# Altium PCB PCB.PcbDoc (part 5 of 11)
Units mm, origin at the board's own origin, x right, y up, seen from the top; angles counter-clockwise.
Board outline 100.46 x 70.51 mm, 10 copper layers (L1(SIG), L2(GND), L3(PWR), L4(SIG), L5(GND), L6(SIG), L7(GND), L8(SIG), L9(GND), L10(SIG)), stack 1.49 mm thick; 425 components, 324 nets, 2004 pads, 1425 vias.
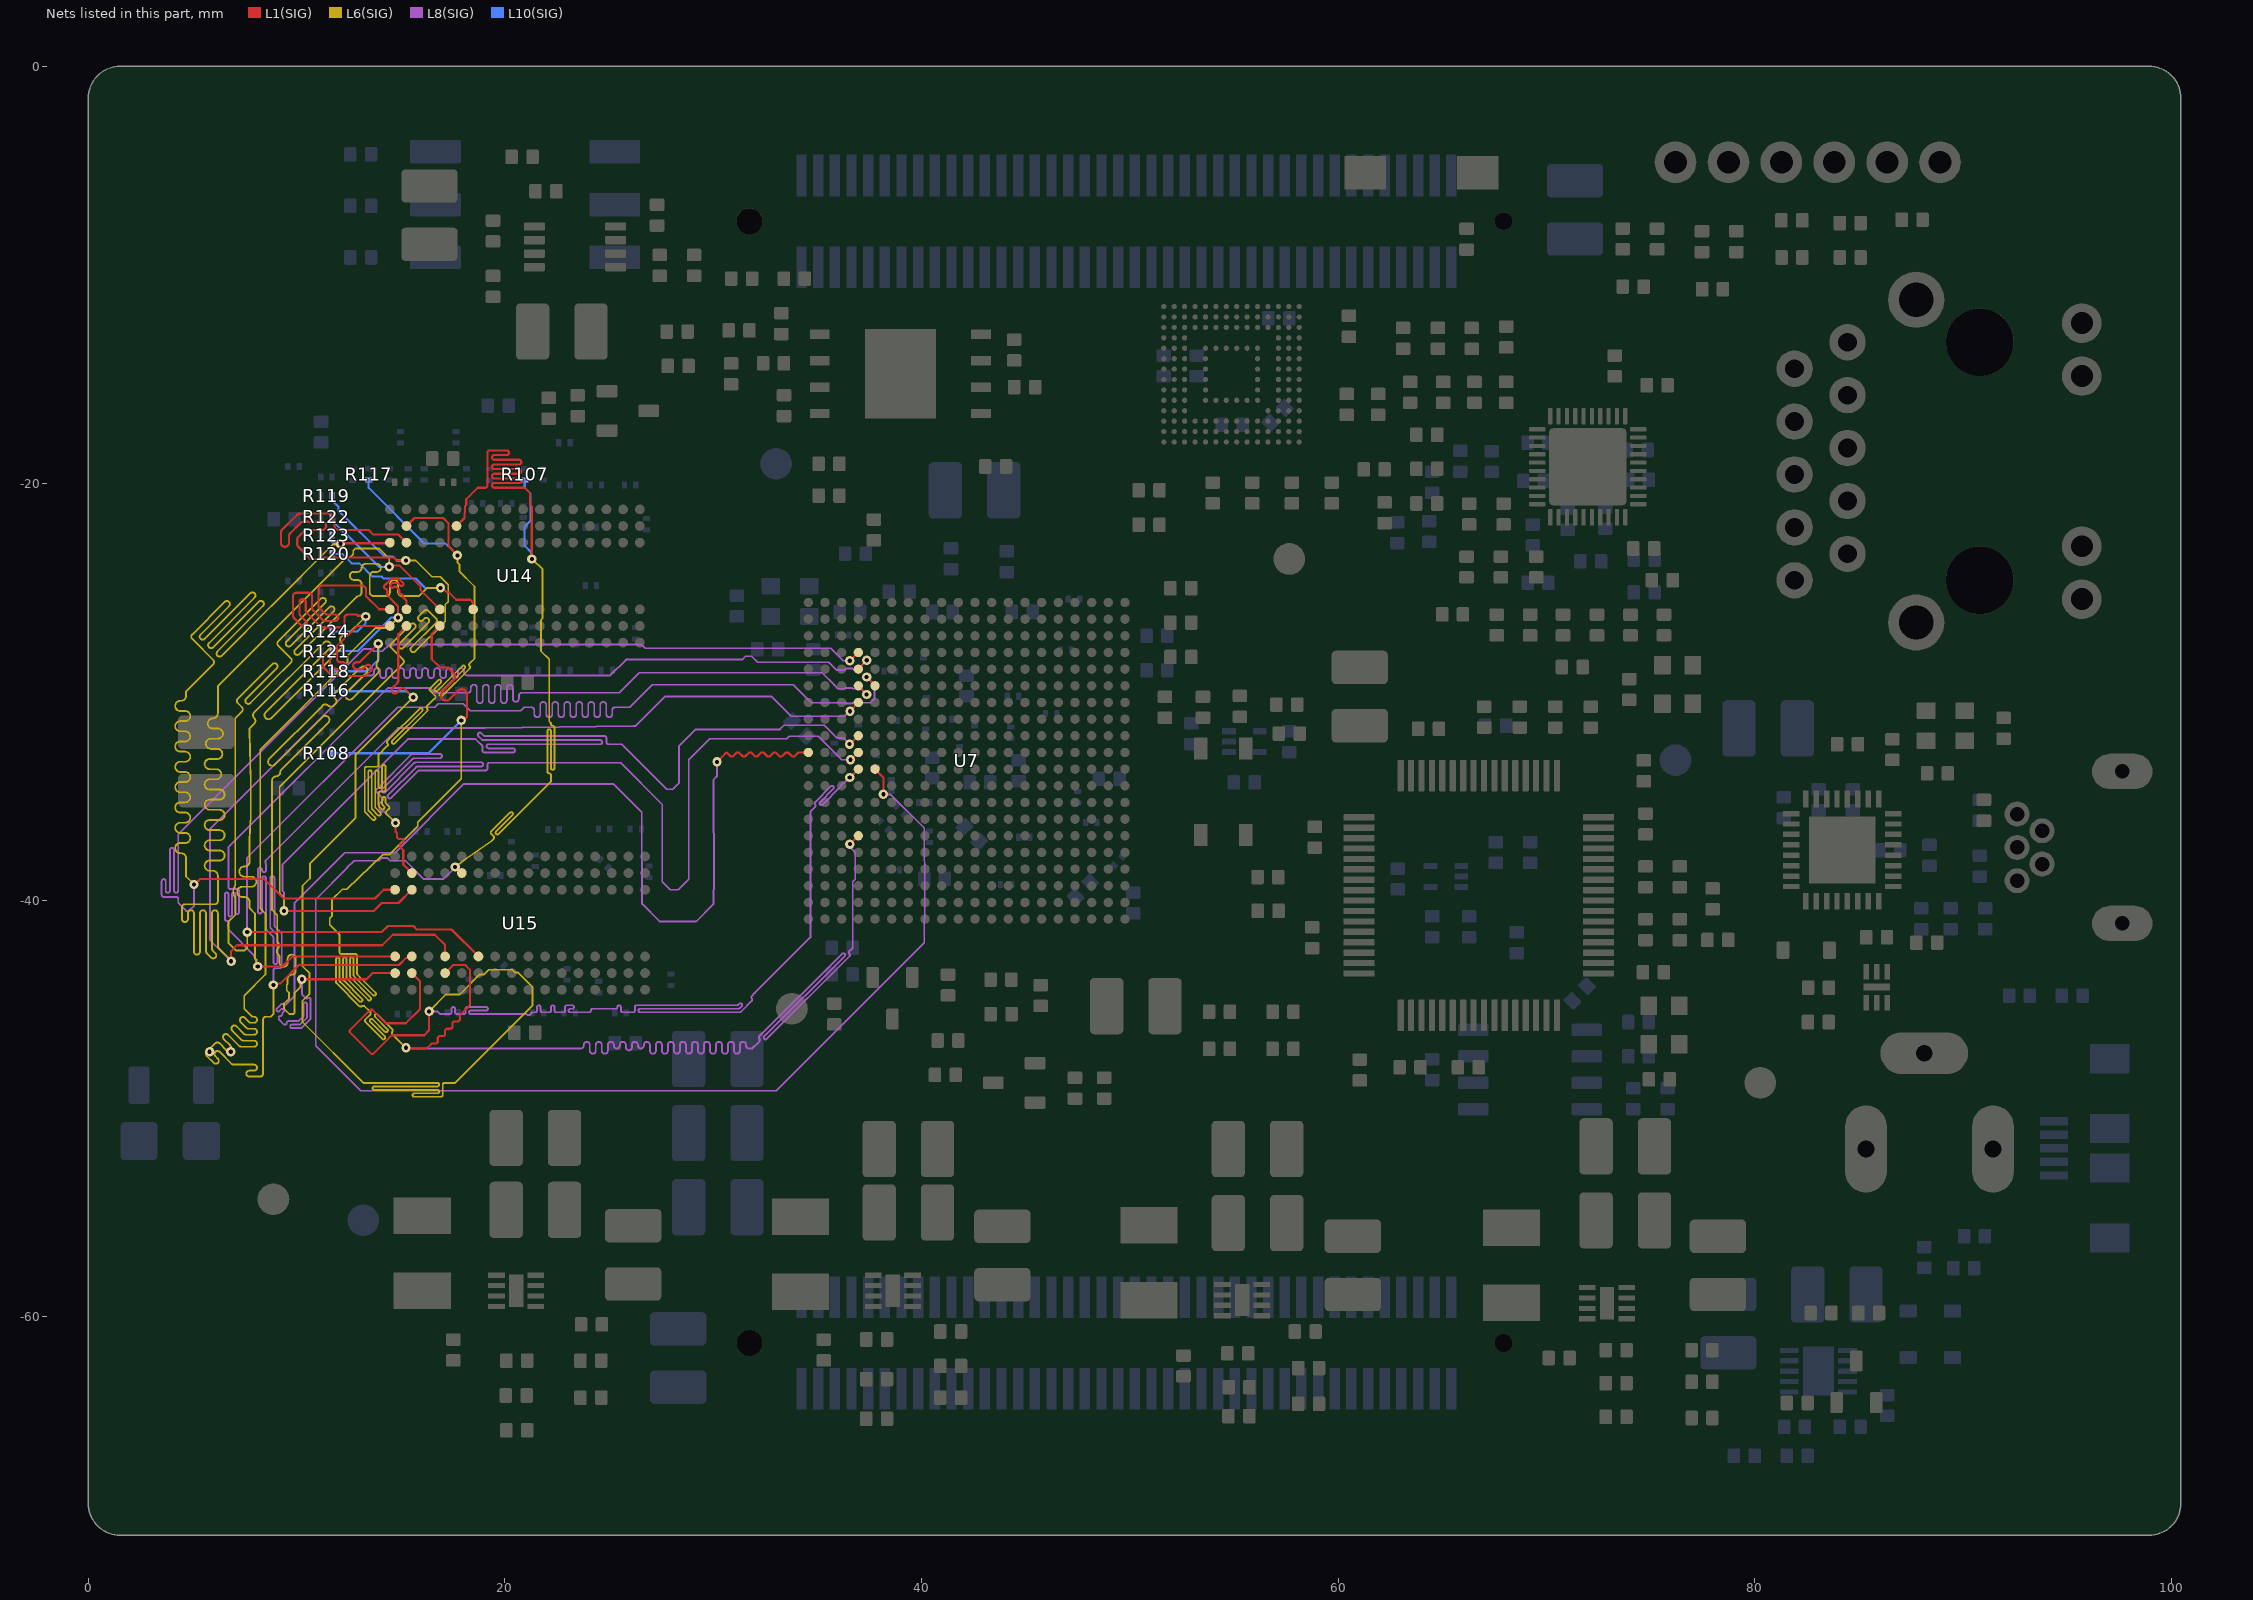
[diagram p12: the nets of this part, all layers, seen from the top]

## Via types
v1: diameter 0.45, hole 0.2, L1(SIG) to L10(SIG), tented both sides, 1194 vias
v2: diameter 0.45, hole 0.2, L1(SIG) to L10(SIG), 211 vias
v3: diameter 0.6, hole 0.25, L1(SIG) to L10(SIG), 9 vias
v4: diameter 0, hole 0.2, L1(SIG) to L10(SIG), tented both sides, 6 vias
v5: diameter 5, hole 3.2, L1(SIG) to L10(SIG), tented both sides, 4 vias
v6: diameter 0.45/0.45/0.45/0.45/0.45/0.45/0.45/0.45/0.45/0.45 (per signal layer), hole 0.2, L1(SIG) to L10(SIG), tented both sides, 1 vias

## Nets (pads, with @x,y where several pads share a name; then routed paths per layer and width w, separated by ;. In a path a pad name is that pad's centre, name@x,y a point inside that pad or via, vN(x,y) a via of type N, cw(c..) or ccw(c..) an arc to the next point about the centre after c; other vN are vias at no path point) (continued)
DDR_A6: R116.1 U7.L4 U14.R8 U15.R8 | length 117
  L1(SIG) w0.103: U14.R8@15.279,-26.839 14.883,-27.235 14.883,-28.809 14.883,-29.479 cw(c14.731,-29.479) 14.838,-29.586 14.608,-29.816 ccw(c14.715,-29.924) 14.608,-30.031 ccw(c14.715,-29.924) 14.822,-30.031 14.992,-29.861 cw(c15.1,-29.968) 15.207,-29.861 15.244,-29.897 v1(15.604,-30.258) ; U15.R8@15.533,-43.501 15.923,-43.89 15.923,-45.23 15.859,-45.294 15.24,-45.913 14.286,-45.913 13.632,-45.258 13.546,-45.258 12.552,-46.252 12.552,-46.338 13.594,-47.379 13.679,-47.379 14.573,-46.486 16.129,-46.486 16.362,-46.253 v1(16.362,-45.338) ; v1@36.57,-34.11 U7.L4@36.97,-33.71
  L6(SIG) w0.088: v1(15.604,-30.258) 12.827,-33.036 12.827,-36.072 10.642,-38.256 10.642,-38.962 10.287,-39.317 10.287,-43.177 10.626,-43.516 10.626,-44.492 10.287,-44.831 10.287,-45.851 13.208,-48.772 13.525,-48.772 16.766,-48.772 cw(c16.766,-48.855) 16.85,-48.855 cw(c16.766,-48.855) 16.766,-48.939 13.737,-48.939 ccw(c13.737,-49.023) 13.653,-49.023 ccw(c13.737,-49.023) 13.737,-49.107 16.766,-49.107 cw(c16.766,-49.191) 16.85,-49.191 cw(c16.766,-49.191) 16.766,-49.274 15.652,-49.274 ccw(c15.652,-49.358) 15.568,-49.358 ccw(c15.652,-49.358) 15.652,-49.442 16.934,-49.442 ccw(c16.934,-49.358) 17.017,-49.358 17.017,-48.855 cw(c17.101,-48.855) 17.101,-48.772 17.145,-48.772 17.617,-48.772 21.326,-45.063 21.326,-44.157 20.647,-43.477 20.487,-43.477 20.354,-43.344 19.226,-43.344 19.006,-43.565 18.796,-43.565 17.831,-44.529 17.171,-44.529 v1(16.362,-45.338)
  L8(SIG) w0.088: v1(16.362,-45.338) 16.765,-45.338 16.893,-45.467 17.145,-45.467 17.357,-45.467 ccw(c17.357,-45.383) 17.442,-45.383 17.442,-45.215 cw(c17.526,-45.215) 17.526,-45.131 cw(c17.526,-45.215) 17.61,-45.215 17.61,-45.383 ccw(c17.694,-45.383) 17.694,-45.467 18.03,-45.467 ccw(c18.03,-45.383) 18.115,-45.383 18.115,-45.215 cw(c18.199,-45.215) 18.199,-45.131 19.103,-45.131 cw(c19.103,-45.215) 19.187,-45.215 cw(c19.103,-45.215) 19.103,-45.299 18.367,-45.299 ccw(c18.367,-45.383) 18.283,-45.383 ccw(c18.367,-45.383) 18.367,-45.467 20.95,-45.467 ccw(c20.95,-45.383) 20.954,-45.467 21,-45.465 cw(c21.003,-45.549) 21.062,-45.489 21.072,-45.5 ccw(c21.131,-45.44) 21.191,-45.5 21.282,-45.408 cw(c21.341,-45.468) 21.341,-45.384 21.46,-45.384 ccw(c21.46,-45.3) 21.544,-45.3 21.544,-45.131 cw(c21.628,-45.131) 21.628,-45.047 cw(c21.628,-45.131) 21.712,-45.131 21.712,-45.3 ccw(c21.796,-45.3) 21.796,-45.384 22.133,-45.384 ccw(c22.133,-45.3) 22.217,-45.3 22.217,-45.131 cw(c22.301,-45.131) 22.301,-45.047 cw(c22.301,-45.131) 22.385,-45.131 22.385,-45.3 ccw(c22.47,-45.3) 22.47,-45.384 22.806,-45.384 ccw(c22.806,-45.3) 22.89,-45.3 22.89,-45.131 cw(c22.974,-45.131) 22.974,-45.047 23.233,-45.047 cw(c23.233,-45.131) 23.317,-45.131 cw(c23.233,-45.131) 23.233,-45.216 23.143,-45.216 ccw(c23.143,-45.3) 23.058,-45.3 ccw(c23.143,-45.3) 23.143,-45.384 24.045,-45.384 ccw(c24.045,-45.3) 24.129,-45.3 cw(c24.213,-45.3) 24.213,-45.216 24.257,-45.216 25.273,-45.216 25.317,-45.216 ccw(c25.317,-45.131) 25.401,-45.131 cw(c25.485,-45.131) 25.485,-45.047 cw(c25.485,-45.131) 25.57,-45.131 25.57,-45.3 ccw(c25.654,-45.3) 25.654,-45.384 26.158,-45.384 ccw(c26.158,-45.3) 26.243,-45.3 26.243,-45.131 cw(c26.327,-45.131) 26.327,-45.047 31.137,-45.047 ccw(c31.137,-44.963) 31.197,-45.023 31.248,-44.972 cw(c31.307,-45.031) 31.367,-44.972 cw(c31.307,-45.031) 31.367,-45.091 31.266,-45.191 cw(c31.207,-45.131) 31.207,-45.216 26.495,-45.216 ccw(c26.495,-45.3) 26.411,-45.3 ccw(c26.495,-45.3) 26.495,-45.384 31.277,-45.384 ccw(c31.277,-45.3) 31.336,-45.36 31.855,-44.84 ccw(c31.795,-44.781) 31.855,-44.722 cw(c31.914,-44.662) 31.855,-44.603 32.005,-44.452 34.671,-41.787 34.671,-35.753 34.864,-35.56 34.895,-35.529 ccw(c34.836,-35.469) 34.895,-35.41 cw(c34.954,-35.35) 34.895,-35.291 35.652,-34.534 cw(c35.711,-34.594) 35.771,-34.534 cw(c35.711,-34.594) 35.771,-34.653 35.133,-35.291 ccw(c35.192,-35.35) 35.133,-35.41 ccw(c35.192,-35.35) 35.252,-35.41 36.097,-34.564 cw(c36.157,-34.624) 36.102,-34.56 36.139,-34.529 ccw(c36.084,-34.465) 36.168,-34.466 36.168,-34.456 cw(c36.252,-34.456) 36.252,-34.372 36.296,-34.372 v1(36.559,-34.11)
  L10(SIG) w0.103: R116.1@11.672,-29.968 15.284,-29.968 15.574,-30.258 v1(15.604,-30.258)
DDR_A7: R117.1 U7.K4 U14.R2 U15.R2 | length 109.4
  L1(SIG) w0.103: v1(14.752,-36.292) 14.752,-36.704 14.83,-36.782 14.83,-36.995 14.901,-37.065 15.113,-37.065 15.12,-37.072 15.12,-37.197 14.97,-37.347 14.97,-37.447 15.12,-37.597 15.12,-38.029 15.12,-38.287 U15.R2@15.533,-38.701 ; U14.R2@15.279,-22.039 15.666,-21.652 17.039,-21.652 17.292,-21.905 17.292,-22.999 17.723,-23.429 v1(17.723,-23.449) ; v1(36.594,-33.26) 36.607,-33.26 36.957,-32.91 U7.K4@36.97,-32.91
  L6(SIG) w0.088: v1(14.752,-36.292) 14.347,-35.887 14.316,-35.856 cw(c14.375,-35.797) 14.315,-35.738 14.435,-35.619 ccw(c14.375,-35.56) 14.435,-35.501 14.302,-35.368 cw(c14.361,-35.309) 14.277,-35.309 14.277,-35.132 ccw(c14.194,-35.132) 14.194,-35.048 ccw(c14.194,-35.132) 14.11,-35.132 14.11,-35.378 ccw(c14.194,-35.378) 14.134,-35.437 14.198,-35.501 cw(c14.138,-35.56) 14.197,-35.619 cw(c14.138,-35.56) 14.079,-35.619 13.966,-35.507 cw(c14.026,-35.448) 13.942,-35.448 13.942,-34.874 cw(c14.026,-34.874) 14.026,-34.79 14.194,-34.79 ccw(c14.194,-34.706) 14.277,-34.706 14.277,-33.597 ccw(c14.194,-33.597) 14.194,-33.513 ccw(c14.194,-33.597) 14.11,-33.597 14.11,-34.539 cw(c14.026,-34.539) 14.026,-34.622 cw(c14.026,-34.539) 13.942,-34.539 13.942,-33.848 ccw(c13.858,-33.848) 13.858,-33.764 ccw(c13.858,-33.848) 13.775,-33.848 13.775,-35.517 ccw(c13.858,-35.517) 13.799,-35.576 14.026,-35.803 cw(c13.966,-35.862) 14.026,-35.921 cw(c13.966,-35.862) 13.907,-35.921 13.631,-35.645 cw(c13.691,-35.587) 13.607,-35.587 13.607,-33.848 ccw(c13.523,-33.848) 13.523,-33.764 ccw(c13.523,-33.848) 13.439,-33.848 13.439,-35.656 ccw(c13.523,-35.656) 13.464,-35.715 13.766,-36.017 cw(c13.707,-36.076) 13.766,-36.136 cw(c13.707,-36.076) 13.647,-36.136 13.296,-35.784 cw(c13.356,-35.725) 13.272,-35.725 13.272,-33.681 cw(c13.356,-33.681) 13.356,-33.597 13.858,-33.597 ccw(c13.858,-33.513) 13.942,-33.513 13.942,-33.469 13.942,-33.01 14.33,-32.622 14.361,-32.591 ccw(c14.302,-32.532) 14.361,-32.472 cw(c14.42,-32.413) 14.361,-32.354 15.912,-30.803 cw(c15.971,-30.862) 16.031,-30.803 cw(c15.971,-30.862) 16.031,-30.921 14.598,-32.354 ccw(c14.657,-32.413) 14.598,-32.472 ccw(c14.657,-32.413) 14.717,-32.472 16.268,-30.921 ccw(c16.208,-30.862) 16.268,-30.803 cw(c16.327,-30.744) 16.268,-30.684 16.299,-30.653 16.616,-30.336 16.647,-30.305 ccw(c16.588,-30.246) 16.648,-30.187 16.41,-29.949 cw(c16.469,-29.89) 16.41,-29.831 16.801,-29.44 cw(c16.86,-29.499) 16.92,-29.44 cw(c16.86,-29.499) 16.92,-29.558 16.647,-29.831 ccw(c16.706,-29.89) 16.648,-29.95 ccw(c16.706,-29.89) 16.765,-29.95 17.955,-28.76 cw(c18.014,-28.82) 18.073,-28.76 cw(c18.014,-28.82) 18.073,-28.879 16.884,-30.068 ccw(c16.943,-30.127) 16.884,-30.186 ccw(c16.943,-30.127) 17.003,-30.186 18.31,-28.879 ccw(c18.251,-28.82) 18.31,-28.76 cw(c18.369,-28.701) 18.31,-28.642 18.341,-28.611 18.542,-28.41 18.542,-24.944 17.818,-24.22 17.818,-23.882 17.723,-23.787 v1(17.723,-23.449)
  L8(SIG) w0.088: v1(14.752,-36.292) 14.206,-35.746 14.091,-35.746 13.97,-35.625 13.97,-35.383 14.091,-35.262 14.122,-35.231 ccw(c14.052,-35.161) 14.122,-35.091 13.842,-34.81 cw(c13.912,-34.74) 13.841,-34.67 15.495,-33.016 cw(c15.565,-33.086) 15.565,-32.987 16.881,-32.987 cw(c16.881,-33.086) 16.981,-33.086 cw(c16.881,-33.086) 16.881,-33.186 15.647,-33.186 ccw(c15.647,-33.285) 15.578,-33.214 14.122,-34.67 ccw(c14.192,-34.74) 14.093,-34.74 ccw(c14.192,-34.74) 14.262,-34.81 15.66,-33.413 cw(c15.73,-33.483) 15.73,-33.384 18.863,-33.384 cw(c18.863,-33.483) 18.962,-33.483 cw(c18.863,-33.483) 18.863,-33.582 15.812,-33.582 ccw(c15.812,-33.681) 15.742,-33.611 14.402,-34.95 ccw(c14.473,-35.02) 14.402,-35.091 ccw(c14.473,-35.02) 14.543,-35.091 15.824,-33.809 cw(c15.894,-33.879) 15.894,-33.78 19.062,-33.78 ccw(c19.062,-33.681) 19.161,-33.681 19.161,-33.504 cw(c19.26,-33.504) 19.26,-33.405 19.304,-33.405 25.554,-33.405 27.559,-35.409 27.559,-39.12 27.94,-39.501 28.321,-39.501 28.829,-38.993 28.829,-33.264 29.838,-32.255 33.535,-32.255 33.655,-32.135 35.052,-32.135 36.177,-33.26 v1(36.594,-33.26)
  L10(SIG) w0.103: R117.1@13.462,-19.837 13.462,-20.205 16.142,-22.885 17.158,-22.885 v1(17.723,-23.449)
DDR_A8: R118.1 U7.K1 U14.T8 U15.T8 | length 111
  L1(SIG) w0.103: v1(10.256,-43.796) 13.357,-43.796 13.653,-43.501 U15.T8@14.733,-43.501 ; 13.245,-28.362 13.208,-28.398 ; 13.264,-28.814 13.215,-28.863 cw(c13.097,-28.745) 13.097,-28.912 12.883,-28.912 cw(c12.883,-28.745) 12.883,-28.579 12.959,-28.579 ccw(c12.959,-28.412) 13.076,-28.53 13.142,-28.464 ; 13.264,-28.814 13.326,-28.752 cw(c13.444,-28.87) 13.562,-28.752 cw(c13.444,-28.87) 13.562,-28.988 13.353,-29.197 cw(c13.235,-29.079) 13.235,-29.245 11.791,-29.245 cw(c11.791,-29.079) 11.673,-29.196 11.32,-28.843 cw(c11.438,-28.725) 11.271,-28.725 11.271,-28.369 cw(c11.438,-28.369) 11.438,-28.202 cw(c11.438,-28.369) 11.605,-28.369 11.605,-28.587 ccw(c11.771,-28.587) 11.653,-28.705 11.811,-28.863 ccw(c11.93,-28.745) 11.93,-28.912 12.216,-28.912 ccw(c12.216,-28.745) 12.383,-28.745 ccw(c12.216,-28.745) 12.216,-28.579 12.105,-28.579 cw(c12.105,-28.412) 11.938,-28.412 11.938,-28.202 11.938,-28.151 11.938,-27.817 12.916,-26.839 14.443,-26.839 14.479,-26.875 U14.T8@14.479,-26.839 ; v1(13.921,-27.686) 13.142,-28.464 ; v1(30.182,-33.363) 30.43,-33.114 30.635,-32.91 30.645,-32.91 30.84,-33.105 30.94,-33.105 31.135,-32.91 31.235,-32.91 31.43,-33.105 31.53,-33.105 31.725,-32.91 31.825,-32.91 32.02,-33.105 32.12,-33.105 32.315,-32.91 32.415,-32.91 32.61,-33.105 32.71,-33.105 32.905,-32.91 33.005,-32.91 33.2,-33.105 33.3,-33.105 33.495,-32.91 33.595,-32.91 33.79,-33.105 33.89,-33.105 34.085,-32.91 34.163,-32.91 U7.K1@34.57,-32.91 ; 13.142,-28.464 13.208,-28.398 ; 13.142,-28.464 13.208,-28.398
  L6(SIG) w0.088: v1(10.256,-43.796) 10.196,-43.857 10.196,-44.153 9.906,-44.442 9.906,-45.415 9.855,-45.466 9.652,-45.466 9.398,-45.212 9.398,-44.968 9.642,-44.724 9.642,-44.451 9.527,-44.337 9.527,-44.064 9.574,-44.018 9.574,-43.82 9.574,-43.776 cw(c9.767,-43.776) 9.767,-43.582 ccw(c9.767,-43.389) 9.961,-43.389 9.961,-42.811 ccw(c9.767,-42.811) 9.767,-42.617 ccw(c9.767,-42.811) 9.574,-42.811 9.574,-43.001 cw(c9.38,-43.001) 9.38,-43.195 cw(c9.38,-43.001) 9.186,-43.001 9.186,-42.744 ccw(c8.992,-42.744) 9.13,-42.608 9.108,-42.586 cw(c9.246,-42.449) 9.109,-42.312 ccw(c8.972,-42.175) 9.109,-42.038 9.078,-42.007 9.078,-40.718 8.828,-40.468 8.828,-34.294 8.828,-34.25 cw(c9.022,-34.25) 9.022,-34.056 ccw(c9.022,-33.862) 9.216,-33.869 9.216,-33.862 cw(c9.41,-33.869) 9.272,-33.732 11.523,-31.481 ccw(c11.386,-31.344) 11.523,-31.207 ccw(c11.386,-31.344) 11.249,-31.207 8.965,-33.491 cw(c8.828,-33.354) 8.691,-33.491 cw(c8.828,-33.354) 8.691,-33.217 11.25,-30.658 cw(c11.386,-30.796) 11.524,-30.659 ccw(c11.66,-30.522) 11.797,-30.659 11.828,-30.628 11.859,-30.597 ccw(c11.722,-30.46) 11.859,-30.322 cw(c11.996,-30.186) 11.859,-30.049 13.068,-28.84 cw(c13.205,-28.977) 13.342,-28.84 cw(c13.205,-28.977) 13.342,-29.114 12.407,-30.049 ccw(c12.544,-30.186) 12.407,-30.323 ccw(c12.544,-30.186) 12.681,-30.323 13.891,-29.114 ccw(c13.753,-28.977) 13.89,-28.84 cw(c14.027,-28.703) 13.89,-28.566 13.921,-28.535 v1(13.921,-27.686)
  L8(SIG) w0.088: v1(10.256,-43.796) 10.256,-44.52 10.429,-44.693 10.397,-44.661 ; 10.429,-44.693 ccw(c10.488,-44.633) 10.527,-44.708 10.55,-44.696 cw(c10.589,-44.771) 10.673,-44.771 10.673,-45.668 cw(c10.589,-45.668) 10.648,-45.727 10.254,-46.122 cw(c10.195,-46.062) 10.195,-46.146 9.779,-46.146 cw(c9.779,-46.062) 9.695,-46.062 cw(c9.779,-46.062) 9.779,-45.978 10.125,-45.978 ccw(c10.125,-45.893) 10.184,-45.953 10.48,-45.657 ccw(c10.42,-45.598) 10.504,-45.598 10.504,-44.998 ccw(c10.42,-44.998) 10.42,-44.914 ccw(c10.42,-44.998) 10.336,-44.998 10.336,-45.529 cw(c10.252,-45.529) 10.312,-45.588 10.115,-45.785 cw(c10.055,-45.725) 10.055,-45.809 9.61,-45.809 ccw(c9.61,-45.893) 9.526,-45.893 cw(c9.442,-45.893) 9.442,-45.978 9.398,-45.978 9.144,-45.724 9.144,-45.689 9.144,-45.645 cw(c9.228,-45.645) 9.228,-45.561 ccw(c9.228,-45.477) 9.312,-45.477 9.312,-45.461 cw(c9.396,-45.461) 9.337,-45.402 9.375,-45.364 ccw(c9.315,-45.304) 9.375,-45.245 ccw(c9.315,-45.304) 9.256,-45.245 9.178,-45.323 cw(c9.119,-45.263) 9.059,-45.323 cw(c9.119,-45.263) 9.059,-45.204 9.256,-45.006 cw(c9.315,-45.066) 9.375,-45.007 ccw(c9.434,-44.947) 9.494,-45.007 9.525,-44.976 9.906,-44.595 9.906,-40.136 12.319,-37.723 14.732,-37.723 18.034,-34.421 25.204,-34.421 26.569,-35.786 26.569,-38.173 26.588,-38.191 26.588,-40.181 27.432,-41.025 29.179,-41.025 29.99,-40.213 30.016,-40.188 30.043,-38.79 30.043,-37.974 30.035,-37.965 30.021,-35.582 30.016,-35.577 30.016,-34.227 30.182,-34.061 v1(30.182,-33.363)
  L10(SIG) w0.103: R118.1@11.687,-29.015 13.371,-29.015 13.921,-28.465 v1(13.921,-27.686)
DDR_A9: R119.1 U7.J4 U14.R3 U15.R3 | length 113.7
  L1(SIG) w0.103: v1(9.398,-40.517) 13.716,-40.517 14.097,-40.136 14.898,-40.136 U15.R3@15.533,-39.501 ; v1(15.251,-23.695) 14.804,-23.695 14.664,-23.554 11.124,-23.554 11.049,-23.629 10.672,-23.629 10.541,-23.499 10.504,-23.462 10.09,-23.048 cw(c10.23,-22.909) 10.033,-22.909 10.033,-22.691 cw(c10.23,-22.691) 10.09,-22.552 10.357,-22.286 cw(c10.495,-22.425) 10.495,-22.229 11.226,-22.229 ccw(c11.226,-22.032) 11.423,-22.032 ccw(c11.226,-22.032) 11.226,-21.835 10.333,-21.835 ccw(c10.333,-22.032) 10.194,-21.892 9.697,-22.389 ccw(c9.836,-22.528) 9.64,-22.528 9.64,-22.842 cw(c9.443,-22.842) 9.443,-23.039 cw(c9.443,-22.842) 9.246,-22.842 9.246,-22.365 cw(c9.443,-22.365) 9.303,-22.226 10.031,-21.499 cw(c10.17,-21.638) 10.17,-21.442 11.62,-21.442 cw(c11.62,-21.638) 11.817,-21.638 11.817,-22.032 ccw(c12.013,-22.032) 12.013,-22.229 12.065,-22.229 13.462,-22.229 13.685,-22.452 14.892,-22.452 U14.R3@15.298,-22.857 ; v1(36.547,-32.51) 36.559,-32.51 36.959,-32.11 U7.J4@36.97,-32.11
  L6(SIG) w0.088: v1(9.398,-40.517) 9.398,-39.871 9.198,-39.67 9.198,-34.56 15.083,-28.675 15.114,-28.644 ccw(c15.019,-28.55) 15.114,-28.456 14.546,-27.887 cw(c14.641,-27.793) 14.546,-27.699 15.492,-26.752 cw(c15.587,-26.847) 15.681,-26.752 cw(c15.587,-26.847) 15.681,-26.941 14.924,-27.698 ccw(c15.019,-27.793) 14.924,-27.888 ccw(c15.019,-27.793) 15.114,-27.888 16.327,-26.674 ccw(c16.232,-26.58) 16.327,-26.485 ccw(c16.232,-26.58) 16.138,-26.485 16.059,-26.563 cw(c15.965,-26.468) 15.87,-26.563 cw(c15.965,-26.468) 15.87,-26.374 16.138,-26.106 cw(c16.232,-26.201) 16.327,-26.106 16.706,-26.485 cw(c16.611,-26.58) 16.706,-26.674 15.51,-27.87 ccw(c15.604,-27.965) 15.51,-28.059 ccw(c15.604,-27.965) 15.699,-28.059 17.084,-26.674 17.115,-26.643 17.14,-26.618 17.14,-25.806 17.28,-25.667 17.28,-24.855 16.895,-24.471 16.502,-24.471 15.726,-23.695 v1(15.251,-23.695)
  L8(SIG) w0.088: v1(9.398,-40.517) 9.398,-39.629 9.32,-39.551 9.32,-38.308 15.367,-32.262 18.288,-32.262 18.545,-32.262 cw(c18.545,-32.361) 18.615,-32.29 18.811,-32.487 ccw(c18.881,-32.416) 18.829,-32.501 18.874,-32.529 cw(c18.822,-32.613) 18.921,-32.612 18.921,-32.813 ccw(c19.02,-32.813) 19.02,-32.912 20.388,-32.912 ccw(c20.388,-32.813) 20.487,-32.813 ccw(c20.388,-32.813) 20.388,-32.714 19.218,-32.714 cw(c19.218,-32.615) 19.218,-32.516 24.578,-32.516 ccw(c24.578,-32.416) 24.677,-32.416 ccw(c24.578,-32.416) 24.578,-32.317 18.963,-32.317 cw(c18.963,-32.218) 18.893,-32.289 18.732,-32.127 cw(c18.802,-32.057) 18.732,-31.987 cw(c18.802,-32.057) 18.872,-31.987 18.976,-32.09 ccw(c19.045,-32.02) 19.045,-32.119 24.777,-32.119 cw(c24.777,-32.218) 24.876,-32.218 24.876,-32.416 ccw(c24.975,-32.416) 24.975,-32.516 25.019,-32.516 25.622,-32.516 27.781,-34.675 28.067,-34.675 28.354,-34.388 28.354,-32.61 29.161,-31.803 33.202,-31.803 33.401,-31.604 35.341,-31.604 35.961,-32.223 36.261,-32.223 v1(36.547,-32.51)
  L10(SIG) w0.103: R119.1@11.708,-20.578 11.736,-20.606 11.736,-20.843 12.011,-21.117 12.011,-21.301 14.208,-23.499 14.611,-23.499 14.807,-23.695 v1(15.251,-23.695)
DDR_A10: R120.1 U7.F5 U14.L7 U15.L7 | length 117.3
  L1(SIG) w0.103: v1(7.63,-41.533) 14.097,-41.533 14.388,-41.242 15.611,-41.242 15.775,-41.406 17.438,-41.406 U15.L7@18.733,-42.701 ; v1(16.911,-25.008) 17.005,-25.008 17.215,-25.218 17.311,-25.218 17.67,-25.578 18.341,-25.578 18.473,-25.709 18.473,-26.032 U14.L7@18.479,-26.039 ; v1(37.369,-29.288) 37.369,-29.298 37.759,-29.688 U7.F5@37.759,-29.71
  L6(SIG) w0.088: v1(7.63,-41.533) 7.63,-42.285 7.493,-42.422 7.112,-42.422 6.731,-42.041 6.731,-41.045 7.062,-40.714 7.062,-39.879 cw(c7.394,-39.604) 6.99,-39.755 6.962,-39.682 6.962,-39.527 6.99,-39.454 cw(c7.394,-39.604) 6.996,-39.438 7.062,-39.281 7.062,-31.262 7.349,-30.975 7.381,-30.943 ccw(c7.278,-30.842) 7.382,-30.942 ccw(c7.278,-30.842) 7.381,-30.741 7.177,-30.537 cw(c7.278,-30.435) 7.177,-30.334 8.842,-28.669 cw(c8.943,-28.77) 9.045,-28.669 cw(c8.943,-28.77) 9.045,-28.872 7.583,-30.334 ccw(c7.685,-30.435) 7.583,-30.537 ccw(c7.685,-30.435) 7.787,-30.537 9.35,-28.974 9.381,-28.943 9.699,-28.625 9.73,-28.594 ccw(c9.628,-28.493) 9.731,-28.593 ccw(c9.628,-28.493) 9.73,-28.391 9.12,-27.781 cw(c9.221,-27.679) 9.119,-27.578 11.167,-25.53 cw(c11.269,-25.632) 11.371,-25.53 cw(c11.269,-25.632) 11.371,-25.733 9.526,-27.578 ccw(c9.628,-27.679) 9.526,-27.781 ccw(c9.628,-27.679) 9.73,-27.781 11.574,-25.937 cw(c11.676,-26.038) 11.777,-25.937 cw(c11.676,-26.038) 11.777,-26.14 9.933,-27.984 ccw(c10.035,-28.086) 10.035,-28.23 ccw(c10.035,-28.086) 10.136,-28.188 12.082,-26.242 12.113,-26.211 12.765,-25.559 12.795,-25.528 12.864,-25.46 cw(c13.001,-25.597) 12.932,-25.416 12.998,-25.391 ccw(c12.929,-25.21) 13.123,-25.21 13.123,-24.822 ccw(c12.929,-24.822) 12.929,-24.628 12.755,-24.628 cw(c12.755,-24.435) 12.561,-24.435 cw(c12.755,-24.435) 12.755,-24.241 12.929,-24.241 ccw(c12.929,-24.047) 13.123,-24.047 cw(c13.317,-24.047) 13.317,-23.853 13.855,-23.853 cw(c13.855,-24.047) 14.048,-24.047 cw(c13.855,-24.047) 13.855,-24.241 13.705,-24.241 ccw(c13.705,-24.435) 13.511,-24.435 13.511,-25.21 ccw(c13.705,-25.21) 13.705,-25.404 14.294,-25.404 ccw(c14.294,-25.21) 14.488,-25.21 14.488,-24.822 cw(c14.682,-24.822) 14.682,-24.628 cw(c14.682,-24.822) 14.875,-24.822 14.875,-25.21 ccw(c15.069,-25.21) 15.069,-25.404 15.113,-25.404 15.875,-25.404 16.271,-25.008 v1(16.911,-25.008)
  L8(SIG) w0.088: v1(7.63,-41.533) 7.62,-41.523 7.62,-37.977 14.859,-30.738 16.637,-30.738 16.799,-30.575 17.999,-30.575 18.332,-30.909 20.763,-30.909 20.934,-30.738 21.266,-30.738 cw(c21.266,-30.882) 21.41,-30.882 21.41,-31.075 ccw(c21.554,-31.075) 21.554,-31.219 ccw(c21.554,-31.075) 21.699,-31.075 21.699,-30.628 cw(c21.843,-30.628) 21.843,-30.484 cw(c21.843,-30.628) 21.987,-30.628 21.987,-31.075 ccw(c22.131,-31.075) 22.131,-31.219 ccw(c22.131,-31.075) 22.275,-31.075 22.275,-30.628 cw(c22.419,-30.628) 22.419,-30.484 cw(c22.419,-30.628) 22.563,-30.628 22.563,-31.075 ccw(c22.708,-31.075) 22.708,-31.219 ccw(c22.708,-31.075) 22.852,-31.075 22.852,-30.628 cw(c22.996,-30.628) 22.996,-30.484 cw(c22.996,-30.628) 23.14,-30.628 23.14,-31.075 ccw(c23.284,-31.075) 23.284,-31.219 ccw(c23.284,-31.075) 23.428,-31.075 23.428,-30.628 cw(c23.572,-30.628) 23.572,-30.484 cw(c23.572,-30.628) 23.716,-30.628 23.716,-31.075 ccw(c23.861,-31.075) 23.861,-31.219 ccw(c23.861,-31.075) 24.005,-31.075 24.005,-30.628 cw(c24.149,-30.628) 24.149,-30.484 cw(c24.149,-30.628) 24.293,-30.628 24.293,-31.075 ccw(c24.437,-31.075) 24.437,-31.219 ccw(c24.437,-31.075) 24.581,-31.075 24.581,-30.628 cw(c24.725,-30.628) 24.725,-30.484 cw(c24.725,-30.628) 24.87,-30.628 24.87,-31.075 ccw(c25.014,-31.075) 25.014,-31.219 ccw(c25.014,-31.075) 25.158,-31.075 25.158,-30.882 cw(c25.302,-30.882) 25.302,-30.738 26.001,-30.738 26.278,-30.46 27.081,-29.658 33.845,-29.658 34.685,-30.498 34.711,-30.524 36.332,-30.524 36.369,-30.56 36.675,-30.56 36.711,-30.524 37.553,-30.524 37.739,-30.338 37.739,-29.656 v1(37.369,-29.288) v1(37.369,-29.288)
  L10(SIG) w0.103: R120.1@11.708,-23.376 12.196,-23.376 12.652,-23.831 13.007,-23.831 13.637,-24.461 14.076,-24.461 14.169,-24.554 15.711,-24.554 16.165,-25.008 v1(16.911,-25.008)
DDR_A11: R121.1 U7.G4 U14.R7 U15.R7 | length 111.7
  L1(SIG) w0.103: v1(8.89,-44.073) 8.956,-44.006 9.21,-44.006 10.103,-43.114 14.919,-43.114 15.262,-42.771 15.463,-42.771 U15.R7@15.533,-42.701 ; v1(14.874,-26.435) 14.874,-25.887 14.351,-25.364 14.351,-25.193 14.351,-25.141 ccw(c14.259,-25.141) 14.285,-25.054 14.26,-25.046 cw(c14.286,-24.958) 14.221,-24.893 14.502,-24.612 cw(c14.567,-24.677) 14.567,-24.585 14.897,-24.585 cw(c14.897,-24.677) 14.962,-24.612 15.109,-24.759 cw(c15.044,-24.824) 15.109,-24.889 cw(c15.044,-24.824) 14.979,-24.889 14.886,-24.795 ccw(c14.821,-24.86) 14.821,-24.769 14.643,-24.769 ccw(c14.643,-24.86) 14.578,-24.795 14.526,-24.847 ccw(c14.591,-24.912) 14.526,-24.977 ccw(c14.591,-24.912) 14.656,-24.977 cw(c14.719,-25.044) 14.718,-24.952 14.745,-24.952 cw(c14.745,-25.044) 14.81,-24.979 14.903,-25.072 cw(c14.838,-25.137) 14.93,-25.137 14.93,-25.226 ccw(c15.021,-25.226) 15.021,-25.318 cw(c15.021,-25.41) 15.113,-25.41 15.113,-25.462 15.279,-25.628 15.279,-26.035 15.275,-26.039 U14.R7@15.279,-26.039 ; v1(36.567,-30.929) 36.567,-30.921 36.97,-30.518 U7.G4@36.97,-30.51
  L6(SIG) w0.088: v1(8.89,-44.073) 8.89,-45.47 8.763,-45.597 8.58,-45.597 8.536,-45.597 ccw(c8.536,-45.74) 8.392,-45.74 8.392,-48.329 cw(c8.248,-48.329) 8.248,-48.472 7.729,-48.472 cw(c7.729,-48.329) 7.586,-48.329 cw(c7.729,-48.329) 7.729,-48.185 7.961,-48.185 ccw(c7.961,-48.041) 8.104,-48.041 ccw(c7.961,-48.041) 7.961,-47.897 6.981,-47.897 cw(c6.981,-47.754) 6.879,-47.855 6.304,-47.28 ccw(c6.202,-47.382) 6.1,-47.28 ccw(c6.202,-47.382) 6.1,-47.483 6.225,-47.608 cw(c6.123,-47.709) 6.225,-47.811 cw(c6.123,-47.709) 6.022,-47.812 5.694,-47.483 cw(c5.795,-47.382) 5.694,-47.28 6.101,-46.873 cw(c6.202,-46.975) 6.304,-46.873 6.607,-47.177 ccw(c6.709,-47.075) 6.811,-47.177 ccw(c6.709,-47.075) 6.811,-46.974 6.507,-46.67 cw(c6.609,-46.568) 6.507,-46.467 cw(c6.609,-46.568) 6.711,-46.467 7.236,-46.993 ccw(c7.338,-46.891) 7.338,-47.035 7.961,-47.035 ccw(c7.961,-46.891) 8.104,-46.891 ccw(c7.961,-46.891) 7.961,-46.747 7.457,-46.747 cw(c7.457,-46.603) 7.356,-46.705 6.914,-46.263 cw(c7.016,-46.162) 6.914,-46.06 cw(c7.016,-46.162) 7.117,-46.06 7.475,-46.417 ccw(c7.576,-46.316) 7.576,-46.459 7.961,-46.459 ccw(c7.961,-46.316) 8.104,-46.316 ccw(c7.961,-46.316) 7.961,-46.172 7.695,-46.172 cw(c7.695,-46.028) 7.594,-46.13 7.32,-45.856 cw(c7.422,-45.755) 7.321,-45.653 cw(c7.422,-45.755) 7.524,-45.653 7.713,-45.842 ccw(c7.814,-45.74) 7.814,-45.884 7.961,-45.884 ccw(c7.961,-45.74) 8.104,-45.74 ccw(c7.961,-45.74) 7.961,-45.597 7.934,-45.597 cw(c7.934,-45.453) 7.832,-45.554 7.524,-45.247 7.493,-45.216 7.493,-44.581 8.509,-43.565 8.509,-40.644 8.255,-40.39 8.255,-32.77 12.446,-28.579 12.446,-28.271 13.78,-26.938 14.372,-26.938 v1(14.874,-26.435)
  L8(SIG) w0.088: v1(8.89,-44.073) 8.89,-43.413 8.89,-43.369 cw(c8.989,-43.369) 8.989,-43.27 9.187,-43.27 ccw(c9.187,-43.171) 9.287,-43.171 9.287,-41.631 ccw(c9.187,-41.631) 9.258,-41.562 8.966,-41.269 cw(c9.036,-41.2) 8.937,-41.2 8.937,-38.942 ccw(c8.838,-38.942) 8.838,-38.843 ccw(c8.838,-38.942) 8.739,-38.942 8.739,-41.282 ccw(c8.838,-41.282) 8.768,-41.352 9.06,-41.643 cw(c8.989,-41.713) 9.088,-41.713 9.088,-42.973 cw(c8.989,-42.973) 8.989,-43.072 cw(c8.989,-42.973) 8.89,-42.973 8.89,-41.795 ccw(c8.791,-41.795) 8.861,-41.726 8.569,-41.434 cw(c8.64,-41.364) 8.541,-41.364 8.541,-38.954 ccw(c8.442,-38.954) 8.342,-38.954 8.342,-40.54 cw(c8.243,-40.54) 8.243,-40.639 cw(c8.243,-40.54) 8.144,-40.54 8.144,-38.544 cw(c8.243,-38.544) 8.342,-38.544 8.342,-38.557 ccw(c8.442,-38.557) 8.541,-38.557 8.541,-38.319 ccw(c8.442,-38.319) 8.537,-38.294 8.512,-38.2 cw(c8.608,-38.174) 8.509,-38.175 8.509,-38.104 14.871,-31.742 18.078,-31.742 18.09,-31.73 19.05,-31.73 26.162,-31.633 26.282,-31.633 27.686,-30.23 32.809,-30.23 33.75,-31.17 36.298,-31.17 36.539,-30.929 v1(36.567,-30.929)
  L10(SIG) w0.103: R121.1@11.708,-28.047 12.929,-28.047 14.541,-26.435 v1(14.874,-26.435)
  other v1: 5.829,-47.278 6.845,-47.278
DDR_A12: R122.1 U7.E4 U14.N7 U15.N7 | length 115.6
  L1(SIG) w0.103: v1(6.858,-42.93) 6.858,-42.446 7.137,-42.168 14.117,-42.168 14.625,-41.66 16.637,-41.66 17.133,-42.156 U15.N7@17.133,-42.701 ; v1(14.454,-23.993) 14.516,-23.931 14.935,-23.931 15.943,-24.939 15.943,-25.103 U14.N7@16.879,-26.039 ; U7.E4@36.97,-28.91 36.97,-28.898 37.37,-28.498 v1(37.37,-28.487)
  L6(SIG) w0.088: 6.241,-29.704 6.223,-29.722 ; v1(6.858,-42.93) 6.858,-42.9 6.54,-42.582 6.51,-42.551 6.265,-42.307 cw(c6.367,-42.205) 6.223,-42.205 6.223,-40.628 ccw(c6.079,-40.628) 6.079,-40.484 ccw(c6.079,-40.628) 5.935,-40.628 5.935,-42.324 ccw(c6.079,-42.324) 5.977,-42.426 6.103,-42.552 cw(c6.001,-42.653) 6.103,-42.755 cw(c6.001,-42.653) 5.9,-42.755 5.69,-42.545 cw(c5.792,-42.443) 5.648,-42.443 5.648,-40.628 ccw(c5.504,-40.628) 5.504,-40.484 ccw(c5.504,-40.628) 5.36,-40.628 5.36,-42.475 cw(c5.216,-42.475) 5.216,-42.619 cw(c5.216,-42.475) 5.073,-42.475 5.073,-40.628 ccw(c4.929,-40.628) 4.929,-40.484 ccw(c4.929,-40.628) 4.785,-40.628 4.785,-40.905 cw(c4.641,-40.905) 4.641,-41.049 cw(c4.641,-40.905) 4.497,-40.905 4.497,-40.34 cw(c4.641,-40.34) 4.641,-40.196 6.079,-40.196 ccw(c6.079,-40.052) 6.223,-40.052 6.223,-40.009 6.223,-38.876 6.223,-38.832 ccw(c5.979,-38.832) 5.979,-38.588 5.83,-38.588 cw(c5.83,-38.345) 5.587,-38.345 cw(c5.83,-38.345) 5.83,-38.101 6.304,-38.101 ccw(c6.304,-37.857) 6.547,-37.857 ccw(c6.304,-37.857) 6.304,-37.613 5.83,-37.613 cw(c5.83,-37.369) 5.587,-37.369 cw(c5.83,-37.369) 5.83,-37.126 6.304,-37.126 ccw(c6.304,-36.882) 6.547,-36.882 ccw(c6.304,-36.882) 6.304,-36.638 5.83,-36.638 cw(c5.83,-36.394) 5.587,-36.394 cw(c5.83,-36.394) 5.83,-36.15 6.304,-36.15 ccw(c6.304,-35.907) 6.547,-35.907 ccw(c6.304,-35.907) 6.304,-35.663 5.83,-35.663 cw(c5.83,-35.419) 5.587,-35.419 cw(c5.83,-35.419) 5.83,-35.175 6.304,-35.175 ccw(c6.304,-34.931) 6.547,-34.931 ccw(c6.304,-34.931) 6.304,-34.688 5.83,-34.688 cw(c5.83,-34.444) 5.587,-34.444 cw(c5.83,-34.444) 5.83,-34.2 6.145,-34.2 ccw(c6.145,-33.956) 6.389,-33.956 ccw(c6.145,-33.956) 6.145,-33.712 5.83,-33.712 cw(c5.83,-33.469) 5.587,-33.469 cw(c5.83,-33.469) 5.83,-33.225 6.196,-33.225 ccw(c6.196,-32.981) 6.44,-32.981 ccw(c6.196,-32.981) 6.196,-32.737 5.889,-32.737 cw(c5.889,-32.493) 5.645,-32.493 cw(c5.889,-32.493) 5.889,-32.25 6.223,-32.25 ccw(c6.223,-32.006) 6.467,-32.006 ccw(c6.223,-32.006) 6.223,-31.762 5.979,-31.762 cw(c5.979,-31.518) 5.735,-31.518 cw(c5.979,-31.518) 5.979,-31.275 ccw(c5.979,-31.031) 6.223,-31.031 6.223,-30.715 6.223,-29.722 ; v1(14.454,-23.993) 14.454,-23.601 13.97,-23.118 12.827,-23.118 12.726,-23.219 12.726,-23.395 12.583,-23.538 12.407,-23.538 6.223,-29.722
  L8(SIG) w0.088: v1(6.858,-42.93) 5.842,-41.914 5.842,-36.603 13.231,-29.214 13.535,-29.214 13.579,-29.214 ccw(c13.579,-29.069) 13.723,-29.069 13.723,-29.006 cw(c13.867,-29.006) 13.867,-28.861 cw(c13.867,-29.006) 14.011,-29.006 14.011,-29.196 ccw(c14.155,-29.196) 14.155,-29.341 ccw(c14.155,-29.196) 14.3,-29.196 14.3,-29.006 cw(c14.444,-29.006) 14.444,-28.861 cw(c14.444,-29.006) 14.588,-29.006 14.588,-29.196 ccw(c14.732,-29.196) 14.732,-29.341 ccw(c14.732,-29.196) 14.876,-29.196 14.876,-29.006 cw(c15.02,-29.006) 15.02,-28.861 cw(c15.02,-29.006) 15.164,-29.006 15.164,-29.196 ccw(c15.309,-29.196) 15.309,-29.341 ccw(c15.309,-29.196) 15.453,-29.196 15.453,-29.006 cw(c15.597,-29.006) 15.597,-28.861 cw(c15.597,-29.006) 15.741,-29.006 15.741,-29.196 ccw(c15.885,-29.196) 15.885,-29.341 ccw(c15.885,-29.196) 16.029,-29.196 16.029,-29.006 cw(c16.173,-29.006) 16.173,-28.861 cw(c16.173,-29.006) 16.317,-29.006 16.317,-29.196 ccw(c16.462,-29.196) 16.462,-29.341 ccw(c16.462,-29.196) 16.606,-29.196 16.606,-29.006 cw(c16.75,-29.006) 16.75,-28.861 cw(c16.75,-29.006) 16.894,-29.006 16.894,-29.196 ccw(c17.038,-29.196) 17.038,-29.341 ccw(c17.038,-29.196) 17.182,-29.196 17.182,-29.006 cw(c17.326,-29.006) 17.326,-28.861 cw(c17.326,-29.006) 17.471,-29.006 17.471,-29.196 ccw(c17.615,-29.196) 17.615,-29.341 ccw(c17.615,-29.196) 17.759,-29.196 17.759,-29.006 cw(c17.903,-29.006) 17.903,-28.861 cw(c17.903,-29.006) 18.047,-29.006 18.047,-29.069 ccw(c18.191,-29.069) 18.191,-29.214 19.275,-29.214 25.062,-29.214 25.824,-28.452 31.39,-28.452 31.554,-28.288 31.84,-28.288 32.131,-28.579 35.56,-28.579 35.941,-28.96 36.298,-28.96 36.379,-28.879 36.69,-28.879 36.771,-28.96 36.897,-28.96 v1(37.37,-28.487)
  L10(SIG) w0.103: R122.1@11.708,-21.592 11.757,-21.642 11.757,-21.837 12.329,-22.408 12.371,-22.408 13.966,-24.003 14.444,-24.003 v1(14.454,-23.993)
DDR_A13: R123.1 U7.D4 U14.T3 U15.T3 | length 110.8
  L1(SIG) w0.103: v1(5.08,-39.247) 5.11,-39.247 5.364,-38.993 8.45,-38.993 9.38,-39.922 13.766,-39.922 14.188,-39.501 U15.T3@14.733,-39.501 ; v1(12.104,-22.891) 12.13,-22.865 14.453,-22.865 U14.T3@14.479,-22.839 ; v1@36.57,-28.51 U7.D4@36.97,-28.11
  L6(SIG) w0.088: v1(5.08,-39.247) 4.699,-38.866 4.699,-38.033 4.699,-37.989 ccw(c4.455,-37.989) 4.455,-37.745 4.418,-37.745 cw(c4.418,-37.502) 4.174,-37.502 cw(c4.418,-37.502) 4.418,-37.258 4.652,-37.258 ccw(c4.652,-37.014) 4.896,-37.014 ccw(c4.652,-37.014) 4.652,-36.77 4.418,-36.77 cw(c4.418,-36.526) 4.174,-36.526 cw(c4.418,-36.526) 4.418,-36.283 4.652,-36.283 ccw(c4.652,-36.039) 4.896,-36.039 ccw(c4.652,-36.039) 4.652,-35.795 4.418,-35.795 cw(c4.418,-35.551) 4.174,-35.551 cw(c4.418,-35.551) 4.418,-35.307 4.652,-35.307 ccw(c4.652,-35.064) 4.896,-35.064 ccw(c4.652,-35.064) 4.652,-34.82 4.418,-34.82 cw(c4.418,-34.576) 4.174,-34.576 cw(c4.418,-34.576) 4.418,-34.332 4.652,-34.332 ccw(c4.652,-34.089) 4.896,-34.089 ccw(c4.652,-34.089) 4.652,-33.845 4.418,-33.845 cw(c4.418,-33.601) 4.174,-33.601 cw(c4.418,-33.601) 4.418,-33.357 4.652,-33.357 ccw(c4.652,-33.113) 4.896,-33.113 ccw(c4.652,-33.113) 4.652,-32.87 4.418,-32.87 cw(c4.418,-32.626) 4.174,-32.626 cw(c4.418,-32.626) 4.418,-32.382 4.652,-32.382 ccw(c4.652,-32.138) 4.896,-32.138 ccw(c4.652,-32.138) 4.652,-31.894 4.418,-31.894 cw(c4.418,-31.651) 4.174,-31.651 cw(c4.418,-31.651) 4.418,-31.407 4.652,-31.407 ccw(c4.652,-31.163) 4.896,-31.163 ccw(c4.652,-31.163) 4.652,-30.919 4.418,-30.919 cw(c4.418,-30.675) 4.174,-30.675 cw(c4.418,-30.675) 4.418,-30.432 4.455,-30.432 ccw(c4.455,-30.188) 4.699,-30.188 4.699,-29.976 4.897,-29.778 5.969,-28.706 6,-28.674 ccw(c5.898,-28.573) 6.002,-28.673 ccw(c5.898,-28.573) 6,-28.471 4.983,-27.455 cw(c5.085,-27.353) 4.983,-27.251 6.553,-25.681 cw(c6.655,-25.783) 6.757,-25.681 cw(c6.655,-25.783) 6.757,-25.884 5.39,-27.251 ccw(c5.492,-27.353) 5.39,-27.455 ccw(c5.492,-27.353) 5.593,-27.455 7.78,-25.267 cw(c7.882,-25.369) 7.984,-25.267 cw(c7.882,-25.369) 7.984,-25.471 5.796,-27.658 ccw(c5.898,-27.76) 5.754,-27.76 ccw(c5.898,-27.76) 6,-27.861 8.187,-25.674 cw(c8.289,-25.776) 8.39,-25.674 cw(c8.289,-25.776) 8.39,-25.877 6.203,-28.065 ccw(c6.305,-28.166) 6.305,-28.31 ccw(c6.305,-28.166) 6.407,-28.268 8.797,-25.878 8.828,-25.847 11.747,-22.927 12.067,-22.927 v1(12.104,-22.891)
  L8(SIG) w0.088: v1(5.08,-39.247) 5.08,-40.263 4.826,-40.517 4.699,-40.517 4.318,-40.136 4.318,-39.987 4.318,-39.942 ccw(c4.219,-39.942) 4.219,-39.843 3.624,-39.843 cw(c3.624,-39.744) 3.525,-39.744 3.525,-39.09 cw(c3.624,-39.09) 3.624,-38.991 cw(c3.624,-39.09) 3.723,-39.09 3.723,-39.546 ccw(c3.822,-39.546) 3.921,-39.546 3.921,-37.584 cw(c4.021,-37.584) 4.021,-37.485 cw(c4.021,-37.584) 4.12,-37.584 4.12,-39.546 ccw(c4.219,-39.546) 4.219,-39.645 ccw(c4.219,-39.546) 4.318,-39.546 4.318,-37.342 4.318,-36.834 13.216,-27.936 13.585,-27.936 13.704,-28.055 14.116,-28.055 14.441,-27.73 26.552,-27.73 26.731,-27.909 35.647,-27.909 36.247,-28.51 v1(36.559,-28.51)
  L10(SIG) w0.103: R123.1@11.708,-22.472 11.684,-22.496 11.684,-22.78 11.745,-22.841 12.053,-22.841 v1(12.104,-22.891)
DDR_A14: R124.1 U7.F4 U14.T7 U15.T7 | length 110.7
  L1(SIG) w0.103: v1(8.14,-43.184) 9.329,-43.184 9.812,-42.701 U15.T7@14.733,-42.701 ; v1(13.32,-26.38) 13.284,-26.344 12.94,-26.344 12.888,-26.293 12.509,-26.293 12.458,-26.293 ccw(c12.458,-26.444) 12.306,-26.444 12.306,-26.748 cw(c12.154,-26.748) 12.154,-26.899 11.241,-26.899 cw(c11.241,-26.748) 11.135,-26.855 10.486,-26.207 cw(c10.594,-26.1) 10.442,-26.1 10.442,-25.701 ccw(c10.29,-25.701) 10.29,-25.55 ccw(c10.29,-25.701) 10.139,-25.701 10.139,-26.226 ccw(c10.29,-26.226) 10.183,-26.333 10.456,-26.606 cw(c10.349,-26.713) 10.456,-26.82 cw(c10.349,-26.713) 10.241,-26.82 9.879,-26.458 cw(c9.987,-26.351) 9.835,-26.351 9.835,-25.398 cw(c9.987,-25.398) 9.987,-25.246 10.594,-25.246 cw(c10.594,-25.398) 10.746,-25.398 10.746,-25.974 ccw(c10.897,-25.974) 10.79,-26.081 11.26,-26.552 ccw(c11.367,-26.444) 11.367,-26.596 11.851,-26.596 ccw(c11.851,-26.444) 12.003,-26.444 ccw(c11.851,-26.444) 11.851,-26.293 11.493,-26.293 cw(c11.493,-26.141) 11.386,-26.249 11.093,-25.956 cw(c11.201,-25.849) 11.049,-25.849 11.049,-25.085 cw(c11.201,-25.085) 11.093,-24.979 11.176,-24.896 13.208,-24.896 13.335,-25.023 13.335,-25.404 13.97,-26.039 U14.T7@14.479,-26.039 ; U7.F4@36.97,-29.71 36.97,-29.719 37.369,-30.118 v1(37.369,-30.127)
  L6(SIG) w0.088: 7.747,-37.205 7.747,-37.248 ; v1(8.14,-43.184) 8.071,-43.114 8.071,-42.856 7.999,-42.783 7.999,-40.641 7.747,-40.39 7.747,-40.136 7.747,-40.092 ccw(c7.503,-40.092) 7.503,-39.848 7.394,-39.848 cw(c7.394,-39.604) 7.15,-39.604 cw(c7.394,-39.604) 7.394,-39.36 7.824,-39.36 ccw(c7.824,-39.117) 8.067,-39.117 ccw(c7.824,-39.117) 7.824,-38.873 7.495,-38.873 cw(c7.495,-38.629) 7.251,-38.629 cw(c7.495,-38.629) 7.495,-38.385 7.503,-38.385 ccw(c7.503,-38.141) 7.747,-38.141 7.747,-37.248 ; v1(13.32,-26.38) 13.32,-26.383 12.396,-27.307 12.194,-27.307 12.174,-27.327 12.143,-27.358 ccw(c12.28,-27.495) 12.143,-27.632 cw(c12.006,-27.769) 12.143,-27.905 8.791,-31.258 cw(c8.654,-31.121) 8.517,-31.258 cw(c8.654,-31.121) 8.517,-30.984 11.595,-27.906 ccw(c11.458,-27.769) 11.595,-27.632 ccw(c11.458,-27.769) 11.321,-27.632 7.968,-30.985 ccw(c8.105,-31.121) 7.969,-31.259 cw(c7.831,-31.395) 7.968,-31.532 7.938,-31.563 7.773,-31.728 7.747,-31.754 7.747,-31.826 7.799,-34.378 cw(c7.43,-34.385) 7.799,-34.385 7.799,-35.945 cw(c7.43,-35.945) 7.799,-35.961 7.747,-37.132 7.747,-37.248
  L8(SIG) w0.088: v1(8.14,-43.184) 7.977,-42.732 ccw(c7.63,-42.858) 7.97,-42.715 7.949,-42.665 ccw(c7.634,-42.858) 7.897,-42.599 6.816,-41.502 cw(c7.079,-41.243) 6.731,-41.12 6.731,-41.076 ccw(c6.647,-41.076) 6.647,-40.992 cw(c6.647,-40.908) 6.563,-40.908 6.563,-39.721 cw(c6.647,-39.721) 6.647,-39.637 cw(c6.647,-39.721) 6.731,-39.721 6.731,-40.709 ccw(c6.815,-40.709) 6.815,-40.793 ccw(c6.815,-40.709) 6.899,-40.709 6.899,-39.721 cw(c6.983,-39.721) 6.983,-39.637 cw(c6.983,-39.721) 7.068,-39.721 7.068,-40.58 ccw(c7.152,-40.58) 7.152,-40.664 ccw(c7.152,-40.58) 7.236,-40.58 7.236,-39.553 ccw(c7.152,-39.553) 7.152,-39.469 6.815,-39.469 cw(c6.815,-39.384) 6.731,-39.384 6.731,-39.34 6.731,-37.469 14.392,-29.808 16.389,-29.808 16.627,-30.046 18.177,-30.046 18.221,-30.046 ccw(c18.221,-29.902) 18.366,-29.902 18.366,-29.8 cw(c18.51,-29.8) 18.51,-29.656 cw(c18.51,-29.8) 18.654,-29.8 18.654,-30.405 ccw(c18.798,-30.405) 18.798,-30.549 ccw(c18.798,-30.405) 18.942,-30.405 18.942,-29.8 cw(c19.086,-29.8) 19.086,-29.656 cw(c19.086,-29.8) 19.23,-29.8 19.23,-30.405 ccw(c19.375,-30.405) 19.375,-30.549 ccw(c19.375,-30.405) 19.519,-30.405 19.519,-29.8 cw(c19.663,-29.8) 19.663,-29.656 cw(c19.663,-29.8) 19.807,-29.8 19.807,-30.405 ccw(c19.951,-30.405) 19.951,-30.549 ccw(c19.951,-30.405) 20.095,-30.405 20.095,-29.8 cw(c20.239,-29.8) 20.239,-29.656 cw(c20.239,-29.8) 20.383,-29.8 20.383,-30.333 ccw(c20.528,-30.333) 20.528,-30.477 ccw(c20.528,-30.333) 20.672,-30.333 20.672,-30.19 cw(c20.816,-30.19) 20.816,-30.046 21.068,-30.046 25.493,-30.046 26.452,-29.087 35.224,-29.087 35.805,-29.667 35.986,-29.849 36.342,-29.849 36.369,-29.822 36.675,-29.822 36.701,-29.849 37.09,-29.849 v1(37.369,-30.127)
  L10(SIG) w0.103: R124.1@11.708,-27.101 12.916,-27.101 13.317,-26.7 13.317,-26.383 v1(13.32,-26.38)
DDR_BA0: R107.1 U7.L5 U14.M2 U15.M2 | length 107.9
  L1(SIG) w0.103: v1(17.61,-38.408) 17.625,-38.408 17.918,-38.701 U15.M2@17.933,-38.701 ; U14.M2@17.679,-22.039 17.683,-22.039 17.683,-22.035 18.066,-21.652 18.066,-21.42 18.092,-21.393 18.092,-21.078 18.146,-21.024 18.146,-20.755 18.7,-20.201 18.999,-20.201 19.05,-20.201 ccw(c19.05,-20.089) 19.162,-20.089 19.162,-18.525 cw(c19.274,-18.525) 19.274,-18.414 20.089,-18.414 cw(c20.089,-18.525) 20.2,-18.525 cw(c20.089,-18.525) 20.089,-18.637 19.497,-18.637 ccw(c19.497,-18.749) 19.385,-18.749 ccw(c19.497,-18.749) 19.497,-18.86 20.68,-18.86 cw(c20.68,-18.972) 20.792,-18.972 cw(c20.68,-18.972) 20.68,-19.084 19.497,-19.084 ccw(c19.497,-19.196) 19.385,-19.196 ccw(c19.497,-19.196) 19.497,-19.307 20.68,-19.307 cw(c20.68,-19.419) 20.792,-19.419 cw(c20.68,-19.419) 20.68,-19.531 19.497,-19.531 ccw(c19.497,-19.642) 19.385,-19.642 ccw(c19.497,-19.642) 19.497,-19.754 20.68,-19.754 cw(c20.68,-19.866) 20.792,-19.866 cw(c20.68,-19.866) 20.68,-19.977 19.497,-19.977 ccw(c19.497,-20.089) 19.385,-20.089 ccw(c19.497,-20.089) 19.497,-20.201 20.955,-20.201 21.213,-20.459 21.213,-21.026 21.292,-21.105 21.292,-23.621 v1(21.297,-23.626) ; U7.L5@37.77,-33.71 38.17,-34.11 v1(38.17,-34.917)
  L6(SIG) w0.088: v1(17.61,-38.408) 17.61,-38.41 17.621,-38.421 18.117,-38.021 cw(c18.348,-38.308) 18.137,-38.005 19.38,-37.139 19.431,-37.088 19.462,-37.057 ccw(c19.403,-36.997) 19.462,-36.938 19.344,-36.82 cw(c19.403,-36.76) 19.343,-36.701 20.244,-35.8 cw(c20.304,-35.86) 20.363,-35.8 cw(c20.304,-35.86) 20.363,-35.919 19.58,-36.701 ccw(c19.64,-36.76) 19.58,-36.82 ccw(c19.64,-36.76) 19.699,-36.82 20.861,-35.658 20.891,-35.627 22.213,-34.306 22.213,-34.04 22.213,-33.996 ccw(c22.129,-33.996) 22.129,-33.912 cw(c22.129,-33.828) 22.045,-33.828 22.045,-31.879 cw(c22.129,-31.879) 22.129,-31.795 cw(c22.129,-31.879) 22.213,-31.879 22.213,-33.661 ccw(c22.297,-33.661) 22.297,-33.744 ccw(c22.297,-33.661) 22.38,-33.661 22.38,-31.711 ccw(c22.297,-31.711) 22.297,-31.627 cw(c22.297,-31.543) 22.213,-31.543 22.213,-31.5 22.128,-31.415 22.128,-28.44 21.737,-28.049 21.737,-26.542 21.81,-26.469 21.81,-24.12 21.316,-23.626 v1(21.297,-23.626)
  L8(SIG) w0.088: v1(17.61,-38.408) 17.61,-38.432 17.049,-38.993 16.111,-38.993 15.23,-38.112 14.504,-38.112 14.377,-37.985 14.071,-37.985 13.944,-38.112 12.778,-38.112 12.438,-38.428 ccw(c12.69,-38.698) 12.426,-38.439 10.922,-39.968 10.922,-40.004 10.922,-46.994 13.081,-49.153 33.02,-49.153 40.106,-42.066 40.132,-42.041 40.162,-39.715 ccw(c39.793,-39.71) 40.162,-39.706 40.132,-36.539 40.106,-36.514 38.527,-34.935 38.188,-34.935 v1(38.17,-34.917)
  L10(SIG) w0.103: R107.1@20.955,-19.837 20.955,-20.201 21.226,-20.472 21.226,-21.027 21.228,-21.029 21.228,-21.785 20.95,-22.063 20.95,-22.985 21.278,-23.314 21.278,-23.607 v1(21.297,-23.626)
DDR_BA1: R108.1 U7.R4 U14.N8 U15.N8 | length 114.9
  L1(SIG) w0.103: v1(15.253,-47.087) 15.287,-47.121 16.256,-47.121 16.462,-46.915 16.498,-46.878 16.71,-46.878 16.781,-46.808 16.781,-46.596 16.852,-46.525 17.064,-46.525 17.135,-46.454 17.135,-46.242 17.205,-46.171 17.417,-46.171 17.488,-46.101 17.488,-45.889 17.559,-45.818 17.771,-45.818 17.842,-45.747 17.842,-45.535 17.963,-45.414 18.32,-45.057 18.32,-43.34 18.093,-43.114 17.52,-43.114 U15.N8@17.133,-43.501 ; U14.N8@16.879,-26.839 16.492,-27.225 16.492,-28.434 16.891,-28.833 17.039,-28.833 17.272,-28.833 17.535,-29.095 cw(c17.357,-29.273) 17.535,-29.451 17.002,-29.984 ccw(c17.18,-30.162) 17.002,-30.34 ccw(c17.18,-30.162) 17.358,-30.34 17.752,-29.946 cw(c17.93,-30.124) 18.181,-30.124 18.181,-30.301 18.181,-31.192 18.001,-31.372 v1(17.907,-31.372) ; v1(36.562,-37.31) 36.959,-36.913 U7.R4@36.959,-36.91
  L6(SIG) w0.088: 12.415,-39.473 12.413,-39.474 12.206,-39.475 11.696,-39.985 11.696,-40.766 11.591,-40.872 11.591,-41.177 12.065,-41.652 12.065,-42.458 12.065,-42.501 ccw(c12.149,-42.501) 12.149,-42.585 12.819,-42.585 cw(c12.819,-42.669) 12.903,-42.669 12.903,-43.517 ccw(c12.987,-43.517) 12.927,-43.576 13.79,-44.438 cw(c13.731,-44.498) 13.79,-44.557 cw(c13.731,-44.498) 13.671,-44.557 12.76,-43.645 cw(c12.819,-43.586) 12.735,-43.586 12.735,-42.837 ccw(c12.652,-42.837) 12.652,-42.753 ccw(c12.652,-42.837) 12.568,-42.837 12.568,-43.656 ccw(c12.652,-43.656) 12.592,-43.715 13.553,-44.676 cw(c13.494,-44.735) 13.553,-44.794 cw(c13.494,-44.735) 13.435,-44.795 12.424,-43.784 cw(c12.484,-43.725) 12.4,-43.725 12.4,-42.837 ccw(c12.316,-42.837) 12.316,-42.753 ccw(c12.316,-42.837) 12.233,-42.837 12.233,-43.795 ccw(c12.316,-43.795) 12.257,-43.854 13.138,-44.735 cw(c13.079,-44.794) 13.138,-44.853 cw(c13.079,-44.794) 13.02,-44.854 12.089,-43.923 cw(c12.149,-43.864) 12.065,-43.864 12.065,-42.837 ccw(c11.981,-42.837) 11.981,-42.753 ccw(c11.981,-42.837) 11.897,-42.837 11.897,-43.933 ccw(c11.981,-43.933) 11.922,-43.992 13.02,-45.091 ccw(c13.079,-45.031) 13.138,-45.091 cw(c13.197,-45.15) 13.257,-45.09 13.288,-45.121 13.509,-45.343 13.54,-45.374 cw(c13.481,-45.433) 13.54,-45.492 13.303,-45.729 ccw(c13.362,-45.788) 13.303,-45.847 14.115,-46.66 ccw(c14.174,-46.6) 14.233,-46.66 ccw(c14.174,-46.6) 14.233,-46.541 13.54,-45.848 cw(c13.599,-45.788) 13.54,-45.729 cw(c13.599,-45.788) 13.658,-45.729 14.242,-46.313 ccw(c14.301,-46.253) 14.36,-46.313 ccw(c14.301,-46.253) 14.36,-46.194 13.776,-45.61 cw(c13.836,-45.551) 13.777,-45.492 cw(c13.836,-45.551) 13.895,-45.492 14.479,-46.076 14.597,-46.194 cw(c14.538,-46.253) 14.598,-46.312 ccw(c14.657,-46.372) 14.597,-46.431 14.628,-46.462 v1(15.253,-47.087) ; 12.416,-39.472 14.144,-37.814 14.455,-37.814 15.816,-36.453 15.816,-36.258 17.907,-34.167 v1(17.907,-31.372)
  L8(SIG) w0.088: v1(15.253,-47.087) 15.287,-47.121 23.603,-47.121 23.647,-47.121 ccw(c23.647,-46.976) 23.791,-46.976 23.791,-46.945 cw(c23.935,-46.945) 23.935,-46.801 cw(c23.935,-46.945) 24.079,-46.945 24.079,-47.229 ccw(c24.223,-47.229) 24.223,-47.373 ccw(c24.223,-47.229) 24.367,-47.229 24.367,-46.945 cw(c24.512,-46.945) 24.512,-46.801 cw(c24.512,-46.945) 24.656,-46.945 24.656,-47.229 ccw(c24.8,-47.229) 24.8,-47.373 ccw(c24.8,-47.229) 24.944,-47.229 24.944,-46.945 cw(c25.088,-46.945) 25.088,-46.801 cw(c25.088,-46.945) 25.232,-46.945 25.232,-46.976 ccw(c25.376,-46.976) 25.376,-47.121 ccw(c25.376,-46.976) 25.52,-46.976 25.52,-46.945 cw(c25.665,-46.945) 25.665,-46.801 cw(c25.665,-46.945) 25.809,-46.945 25.809,-47.067 ccw(c25.953,-47.067) 25.953,-47.211 ccw(c25.953,-47.067) 26.097,-47.067 26.097,-46.945 cw(c26.241,-46.945) 26.241,-46.801 cw(c26.241,-46.945) 26.385,-46.945 26.385,-46.976 ccw(c26.529,-46.976) 26.529,-47.121 ccw(c26.529,-46.976) 26.674,-46.976 26.674,-46.945 cw(c26.818,-46.945) 26.818,-46.801 cw(c26.818,-46.945) 26.962,-46.945 26.962,-47.229 ccw(c27.106,-47.229) 27.106,-47.373 ccw(c27.106,-47.229) 27.25,-47.229 27.25,-46.945 cw(c27.394,-46.945) 27.394,-46.801 cw(c27.394,-46.945) 27.538,-46.945 27.538,-47.229 ccw(c27.682,-47.229) 27.682,-47.373 ccw(c27.682,-47.229) 27.827,-47.229 27.827,-46.945 cw(c27.971,-46.945) 27.971,-46.801 cw(c27.971,-46.945) 28.115,-46.945 28.115,-47.229 ccw(c28.259,-47.229) 28.259,-47.373 ccw(c28.259,-47.229) 28.403,-47.229 28.403,-46.945 cw(c28.547,-46.945) 28.547,-46.801 cw(c28.547,-46.945) 28.691,-46.945 28.691,-47.229 ccw(c28.836,-47.229) 28.836,-47.373 ccw(c28.836,-47.229) 28.98,-47.229 28.98,-46.945 cw(c29.124,-46.945) 29.124,-46.801 cw(c29.124,-46.945) 29.268,-46.945 29.268,-47.229 ccw(c29.412,-47.229) 29.412,-47.373 ccw(c29.412,-47.229) 29.556,-47.229 29.556,-46.945 cw(c29.7,-46.945) 29.7,-46.801 cw(c29.7,-46.945) 29.844,-46.945 29.844,-47.229 ccw(c29.989,-47.229) 29.989,-47.373 ccw(c29.989,-47.229) 30.133,-47.229 30.133,-46.945 cw(c30.277,-46.945) 30.277,-46.801 cw(c30.277,-46.945) 30.421,-46.945 30.421,-47.229 ccw(c30.565,-47.229) 30.565,-47.373 ccw(c30.565,-47.229) 30.709,-47.229 30.709,-46.945 cw(c30.853,-46.945) 30.853,-46.801 cw(c30.853,-46.945) 30.998,-46.945 30.998,-47.229 ccw(c31.142,-47.229) 31.142,-47.373 ccw(c31.142,-47.229) 31.286,-47.229 31.286,-46.945 cw(c31.43,-46.945) 31.43,-46.801 cw(c31.43,-46.945) 31.574,-46.945 31.574,-46.976 ccw(c31.718,-46.976) 31.718,-47.121 31.877,-47.121 32.186,-46.812 32.217,-46.78 ccw(c32.158,-46.721) 32.218,-46.662 cw(c32.277,-46.602) 32.217,-46.543 36.188,-42.572 cw(c36.247,-42.631) 36.307,-42.572 cw(c36.247,-42.631) 36.307,-42.691 32.455,-46.542 ccw(c32.515,-46.602) 32.455,-46.661 ccw(c32.515,-46.602) 32.574,-46.661 36.545,-42.69 ccw(c36.485,-42.631) 36.544,-42.571 cw(c36.604,-42.512) 36.545,-42.453 36.576,-42.422 36.703,-42.295 36.703,-39.122 36.82,-39.005 36.82,-37.707 36.631,-37.518 36.631,-37.379 v1(36.562,-37.31)
  L10(SIG) w0.103: R108.1@11.687,-32.948 16.332,-32.948 v1(17.907,-31.372)